# Altium PCB RC522.PcbDoc
Units mm, origin at the board's own origin, x right, y up, seen from the top; angles counter-clockwise.
Board outline 99 x 70 mm, 2 copper layers (Top Layer, Bottom Layer); 14 components, 17 nets, 89 pads, 0 vias.
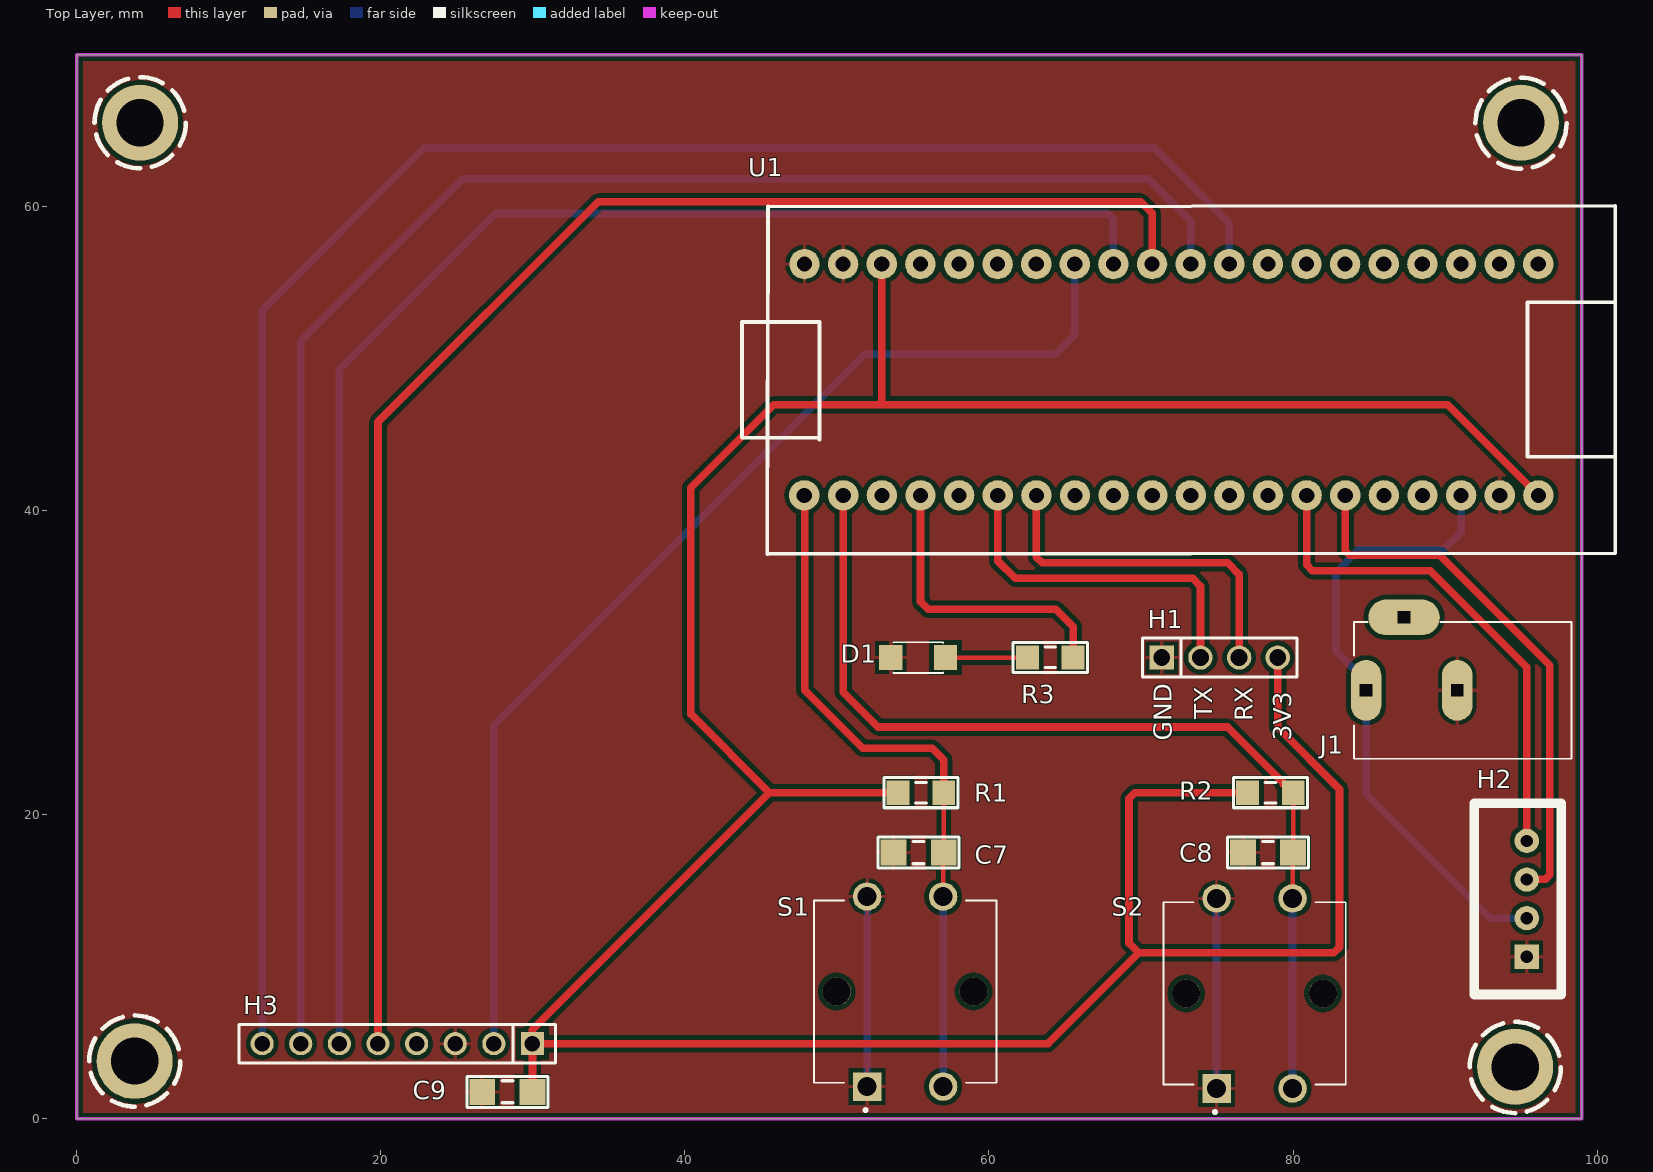
[diagram p0: Top Layer view]
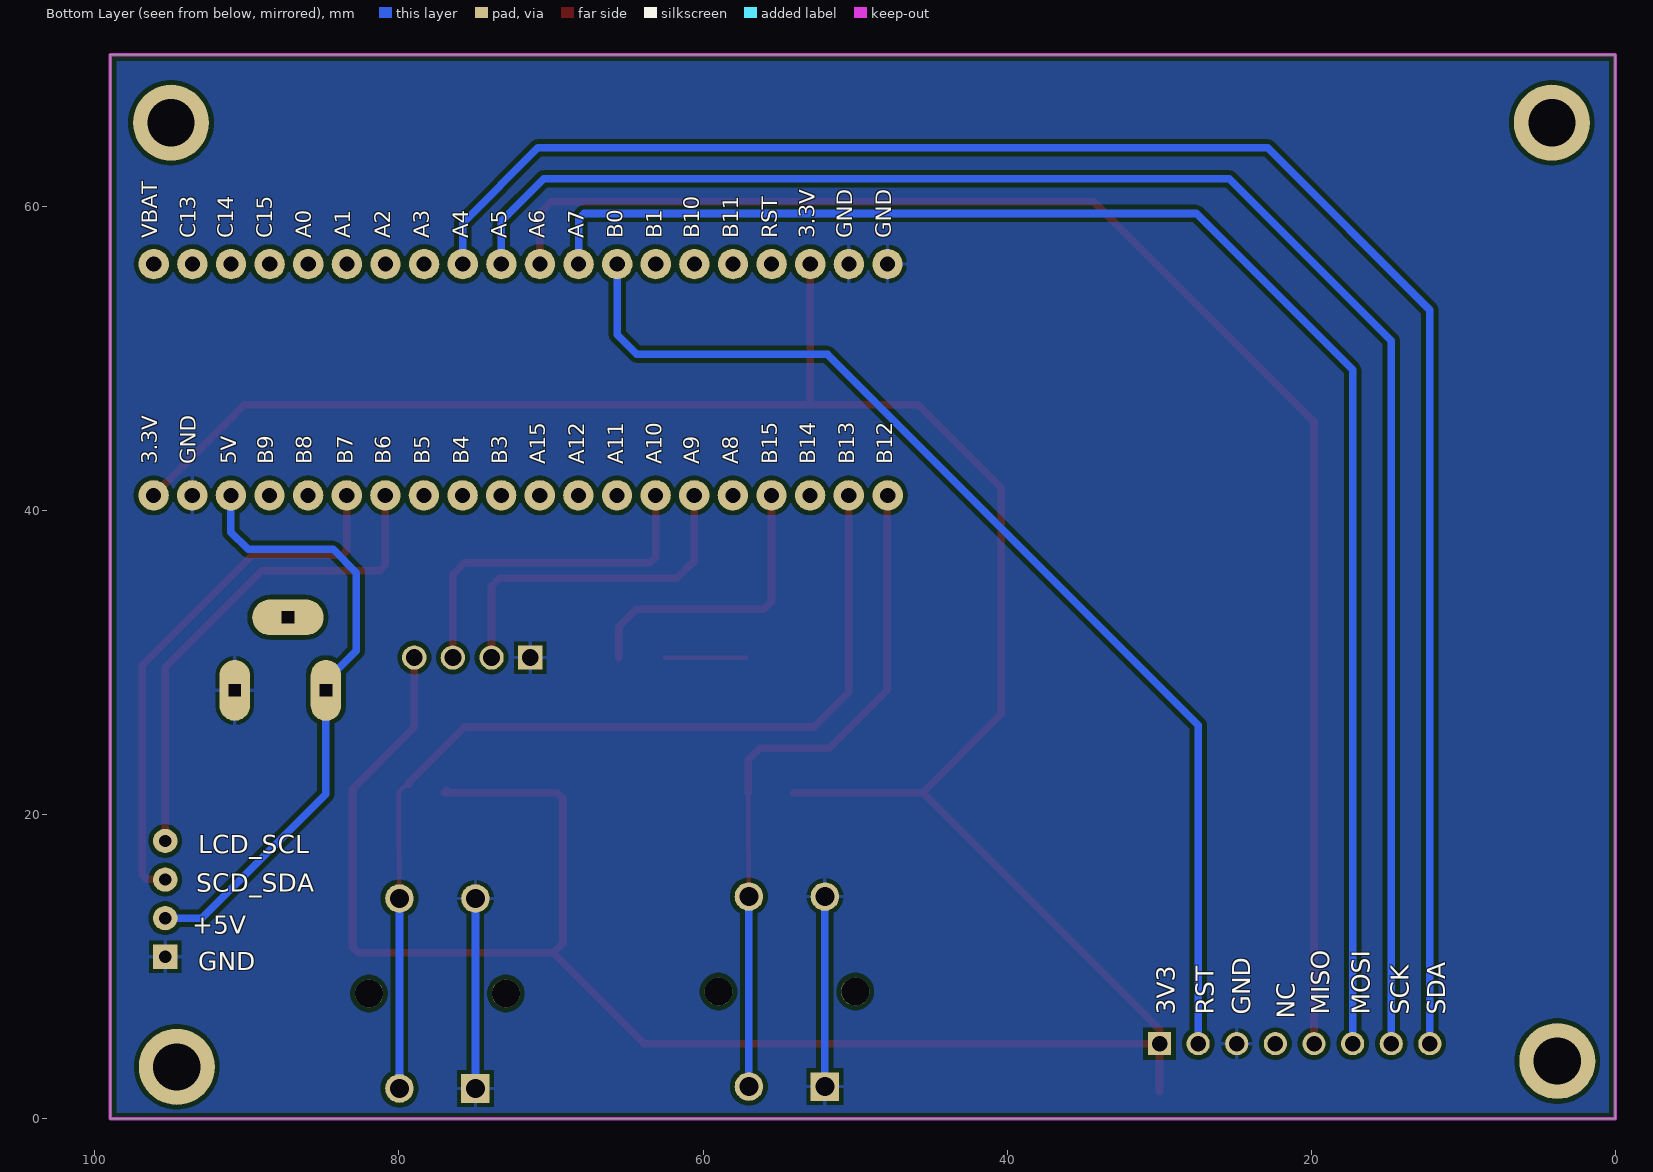
[diagram p1: Bottom Layer view, seen from below]
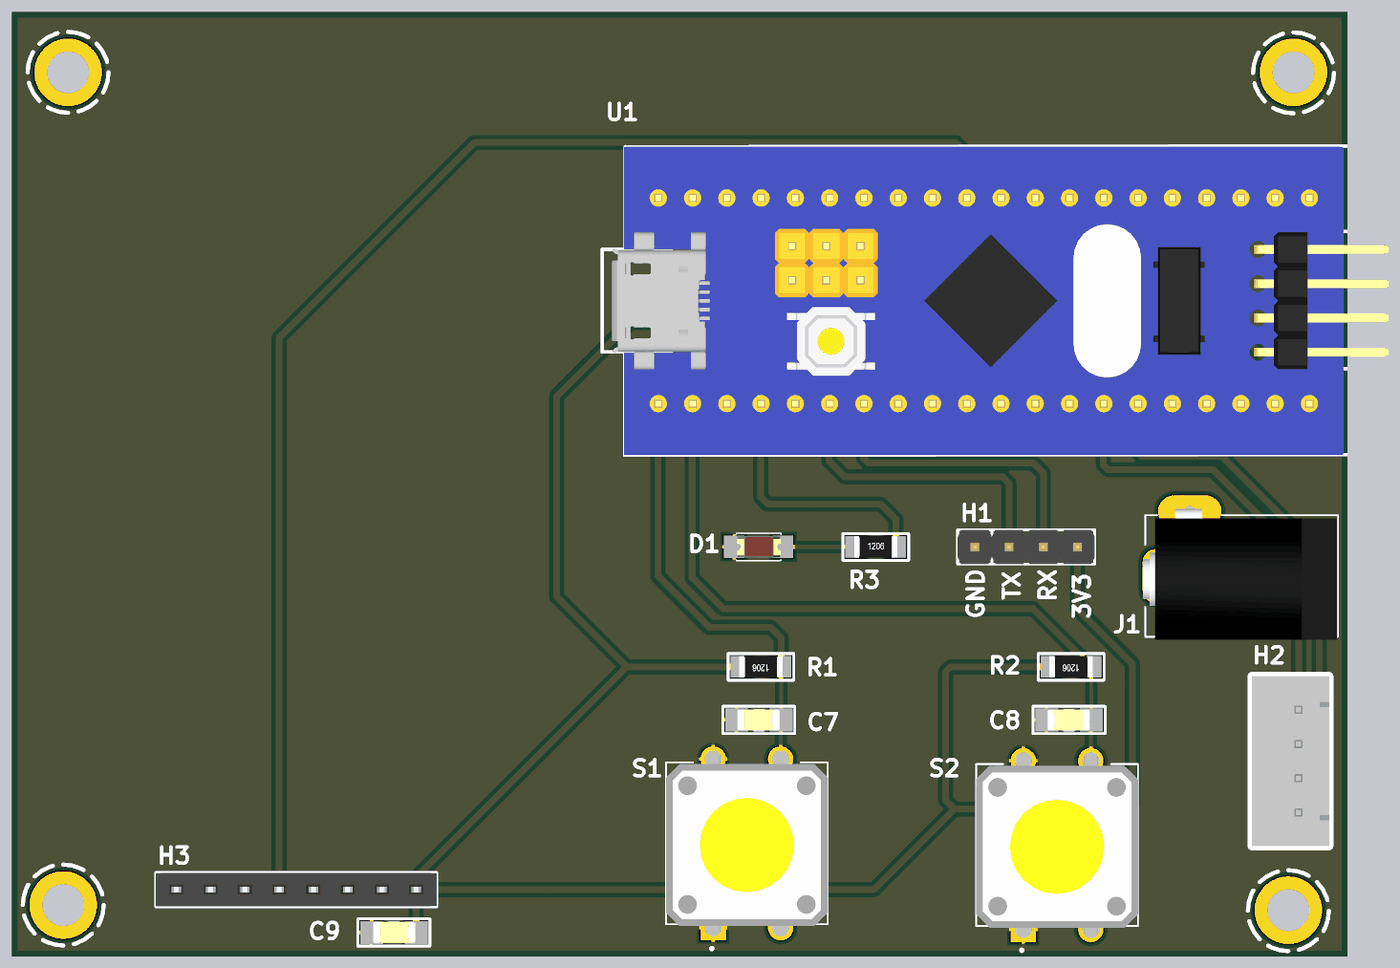
[diagram p2: 3D render of the assembled board from above, using the file's embedded part models]

## Layer stack, top to bottom
Top Solder: solder mask 0.0102, Solder Resist, Dk 3.5
Top Layer: signal copper 0.0356
Dielectric 1: dielectric 0.32, FR-4, Dk 4.8
Bottom Layer: signal copper 0.0356
Bottom Solder: solder mask 0.0102, Solder Resist, Dk 3.5

## Board outline
0,0 0,70 99,70 99,0

## Design rules (kind name [scope] priority, off if disabled: settings)
Clearance [All] p1: gap=0.3 ignorepadtopadclearanceinfootprint=FALSE
PolygonConnect [All] p1: connectstyle=Relief reliefconductorwidth=0.254 reliefentries=4 polygonreliefangle="90 Angle" airgapwidth=0.254
RoutingCorners [All] p1: cornerstyle=45-Degree minsetback=4 maxsetback=4
RoutingVias [All] p1: holewidth=0.711 width=1.27 viastyle="Through Hole" minholewidth=0.711 minwidth=1.27 maxholewidth=0.711 maxwidth=1.27
SolderMaskExpansion [All] p1: expansion=0.102 istentingtop=FALSE
Width [All] p1: maxlimit=0.5 minlimit=0.3 preferedwidth=0.3
29 further rules are at their usual default settings.

## Components (designator, comment, footprint, x,y, rotation, side; value= is the part's Value field where it differs from the comment)
C7 "104" "tu 1206" 55.372,17.526 r180 top
C8 "104" "tu 1206" 78.359,17.526 r180 top
C9 "104" "tu 1206" 28.321,1.778 r0 top
D1 "LED" LED-1206-Red 57.15,30.353 r180 top (schematic designator L1)
H1 "JP 1x4 2.54" "JP 1x4 DT" 71.374,30.353 r0 top
H2 "LCD" XH2.54M-4 95.377,10.668 r90 top
H3 "RC552" "JP 1x8 CT" 29.972,4.953 r180 top
J1 "DC-005" NINIGI_DC-005 87.305,28.194 r180 top
R1 "10k" "tro smd 1206" 55.523,21.463 r180 top
R2 "10k" "tro smd 1206" 78.51,21.463 r180 top
R3 "470R" "tro smd 1206" 64.032,30.353 r0 top
S1 "DK_Thẻ" SW_B3F-4055 54.483,8.382 r90 top
S2 "Điểm Danh" SW_B3F-4055 77.47,8.255 r90 top
U1 "STM32F103C8T6" "Stm32 BluePill" 77.762,48.849 r270 top

## Footprints (in the part's own frame and the unit in brackets; to place one, negate y for a bottom-side part, rotate by r counter-clockwise, add the part's x,y. Pads: shape width x height; smd on the part's side, far side on the other; paste and mask are expansions set on the pad)
"JP 1x4 DT" [mm] "4 pins, 1 row, straight, gold plating"
  rect 1.6x1.6 hole 1.1: 1(0,0)
  round 1.6 hole 1.1: 2(2.54,0) 3(5.08,0) 4(7.62,0)
  silkscreen extent -1.27,-1.27 8.89,1.27, body extent -1.27,-1.27 8.89,1.27, height 8.54
"JP 1x8 CT" [mm] "8 row, straight, gold plating"
  rect 1.52x1.52 hole 1.02: 1(0,0)
  round 1.52 hole 1.02: 2(2.54,0) 3(5.08,0) 4(7.62,0) 5(10.16,0) 6(12.7,0) 7(15.24,0) 8(17.78,0)
  silkscreen extent -1.52,-1.27 19.3,1.27, body extent -1.52,-1.25 19.3,1.25, height 8.51
LED-1206-Red [mil]
  rect 60x65 smd: 1(0,0) 2(142,0)
  silkscreen extent 6,-40 136,40, body extent 7,-31 133,32, height 43
NINIGI_DC-005 [mm]
  oval 4.7x2.35 hole 0.8 square: 2(0,-4.8)
  oval 2x4 hole 0.8 square: 3(-3.5,0) 4(2.5,0)
  silkscreen extent -11,-4.5 3.3,4.5, body extent -10.92,-4.98 3.48,4.72, height 11
"Stm32 BluePill" [mm]
  round 2 hole 1: 1(7.828,-29.909) 2(7.828,-27.343) 3(7.828,-24.803) 4(7.828,-22.263) 5(7.828,-19.723) 6(7.828,-17.183) 7(7.828,-14.643) 8(7.828,-12.103) 9(7.828,-9.563) 10(7.828,-7.023) 11(7.828,-4.483) 12(7.828,-1.943) 13(7.828,0.597) 14(7.828,3.137) 15(7.828,5.677) 16(7.828,8.217) 17(7.828,10.757) 18(7.828,13.297) 19(7.828,15.837) 20(7.828,18.377) 21(-7.386,18.366) 22(-7.386,15.826) 23(-7.386,13.286) 24(-7.386,10.746) 25(-7.386,8.206) 26(-7.386,5.666) 27(-7.386,3.126) 28(-7.386,0.586) 29(-7.386,-1.954) 30(-7.386,-4.494) 31(-7.386,-7.034) 32(-7.386,-9.574) 33(-7.386,-12.114) 34(-7.386,-14.654) 35(-7.386,-17.194) 36(-7.386,-19.734) 37(-7.386,-22.274) 38(-7.386,-24.814) 39(-7.386,-27.354) 40(-7.386,-29.894)
  silkscreen extent -11.22,-34 11.69,23.43, body extent -11.18,-33.27 11.68,24.29, height 12.31
SW_B3F-4055 [mm]
  rect 1.875x1.875 hole 1.25: 1(-6.25,2.5)
  round 1.875 hole 1.25: 2(6.25,2.5) 3(-6.25,-2.5) 4(6.25,-2.5)
  round 1.85 hole 1.85 unplated: ""(0,4.5) ""(0,-4.5)
  silkscreen extent -7.9,-6 6,6, body extent -7.13,-6 6.87,6, height 6.9
"tro smd 1206" [mm]
  rect 1.5x1.6 smd: 1(-1.5,0) 2(1.5,0)
  silkscreen extent -2.44,-0.99 2.44,0.99, body extent -1.6,-0.8 1.6,0.8, height 0.6
"tu 1206" [mm]
  rect 1.7x1.7 smd: 1(-1.65,0) 2(1.65,0)
  silkscreen extent -2.67,-1.02 2.67,1.02, body extent -1.57,-0.8 1.63,0.8, height 0.94
XH2.54M-4 [mm]
  rect 1.6x1.6 hole 0.8: 1(0,0)
  round 1.6 hole 0.8: 2(2.54,0) 3(5.08,0) 4(7.62,0)
  silkscreen extent -2.48,-2.26 10.1,3.46, body extent -2.48,-2.26 10.1,3.48, height 6.91

## Part data
C7 C8 C9: library part "Tu 1206 104 50V 20%", "Dán", Chung_Loai=Dán, Don_Vi=Con, Ma_Hang=MH004544, So_Chan=2, Ten_Linh_Kien="Tụ 1206 104-0.1uF 20% 50V"
D1: library part "LED 1206 Do", "Dán", Chung_Loai=Dán, Don_Vi=Con, Ma_Hang=MH002334, Ten_Linh_Kien="LED1206 Màu Đỏ (Red)"
H1: library part "JP 1x4 2.54 Duc Thang", "Cắm", Chung_Loai=Cắm, Don_Vi=Con, Ma_Hang=MH000903, Ten_Linh_Kien="Jump Đơn Đực 2.54MM 1x40P Thẳng 11MM"
H2: library part "Header 4P 2.54 Duc Thang", "Cắm", Chung_Loai=Cắm, Don_Vi=Con, Ma_Hang=MH001285, Ten_Linh_Kien="Header 4P XH2.54-4P Đực Thẳng"
H3: library part "JP 1x8 2.54 Cai Thang", "Cắm", Chung_Loai=Cắm, Don_Vi=Con, Ma_Hang=MH004006, Ten_Linh_Kien="Jump Đơn Cái 2.54MM 1x20P Thẳng"
J1: "DC Jack", Package=None, Availability=Unavailable, MP=DC-005, Price=None
R1 R2: library part "Tro 1206 1% 10k", "Dán", Chung_Loai=Dán, Don_Vi=Con, Ma_Hang=MH005885, So_Chan=2, Ten_Linh_Kien="Trở 1206 1% 10k"
R3: library part "Tro 1206 1% 1k", "Dán", Chung_Loai=Dán, Don_Vi=Con, Ma_Hang=MH005880, So_Chan=2, Ten_Linh_Kien="Trở 1206 1% 1k"
S1 S2: library part B3F-4055, Package=None, Availability=Unavailable, MP=B3F-4055, Price=None
U1: library part BluePill, "Designed By @Alixahedi"

## Free pads (board coordinates)
  round 5 hole 3.1: ""(3.81,3.81) ""(4.166,65.532) ""(94.615,3.429) ""(94.996,65.532)

## Nets (pads, with @x,y where several pads share a name; then routed paths per layer and width w, separated by ;. In a path a pad name is that pad's centre, name@x,y a point inside that pad or via, vN(x,y) a via of type N, cw(c..) or ccw(c..) an arc to the next point about the centre after c; other vN are vias at no path point)
3V3: C9.2 H1.4 H3.1 R1.2 R2.2 U1.20 U1.38 | length 221.6
  Top Layer w0.5: C9.2 C9.2 H3.1 ; U1.38 52.948,47.001 52.959,46.99 ; R1.2 45.563,21.463 ; R2.2@76.848,21.625 R2.2 69.596,21.463 69.215,21.082 69.215,11.557 69.85,10.922 ; H1.4 78.994,25.759 83.058,21.695 83.058,11.303 82.677,10.922 69.85,10.922 ; U1.20 90.17,46.99 52.959,46.99 ; H3.1 63.881,4.953 69.85,10.922 ; H3.1 29.957,4.968 29.957,5.857 45.563,21.463 ; 45.563,21.463 40.386,26.64 40.386,41.529 45.847,46.99 52.959,46.99
+5: H2.2 J1.4 U1.18 | length 41.1
  Bottom Layer w0.5: U1.18 91.059,38.608 89.916,37.465 84.328,37.465 82.804,35.941 82.804,30.789 84.805,28.788 84.805,23.368 84.805,21.367 92.964,13.208 H2.2
BT1: C7.1 R1.1 S1.3 S1.4 U1.1 | length 45.4
  Top Layer w0.3: U1.1 U1.1@47.879,40.996 ; S1.4 56.983,17.487 C7.1 C7.1 R1.1@57.023,21.513
  Top Layer w0.5: U1.1@47.879,40.996 47.879,28.194 51.689,24.384 56.261,24.384 57.023,23.622 R1.1
  Bottom Layer w0.5: S1.3 S1.4
BT2: C8.1 R2.1 S2.3 S2.4 U1.2 | length 64.9
  Top Layer w0.3: R2.1@79.36,22.113 79.41,22.113 80.01,21.513 C8.1 79.97,17.487 S2.4
  Top Layer w0.5: U1.2 50.419,28.067 52.705,25.781 75.692,25.781 79.36,22.113 79.36,22.017 R2.1@79.364,22.013
  Bottom Layer w0.5: S2.3 S2.4
GND: C7.2 C8.2 C9.1 D1.2 H1.1 H2.1 H3.3 J1.3 S1.1 S1.2 S2.1 S2.2 U1.19 U1.39 U1.40 | length 25
  Bottom Layer w0.5: S1.1 S1.2 ; S2.1 S2.2
LCD_SCL: H2.4 U1.14 | length 33.3
  Top Layer w0.5: U1.14 80.899,36.449 81.28,36.068 89.027,36.068 95.377,29.718 H2.4
LCD_SDA: H2.3 U1.15 | length 35.7
  Top Layer w0.5: U1.15 83.439,37.377 83.732,37.084 89.662,37.084 96.901,29.845 96.901,16.065 96.608,15.773 95.402,15.773 H2.3
LED: R3.2 U1.4 | length 19.7
  Top Layer w0.5: U1.4 55.499,34.036 56.007,33.528 64.389,33.528 65.532,32.385 R3.2
MISO: H3.5 U1.31 | length 101.5
  Top Layer w0.5: H3.5 19.812,45.847 34.29,60.325 69.977,60.325 70.739,59.563 70.739,56.246 U1.31
MOSI: H3.6 U1.32 | length 102.6
  Bottom Layer w0.5: H3.6 17.272,49.276 27.559,59.563 67.818,59.563 68.188,59.193 U1.32
NC: H3.4
NetL1_1: D1.1 R3.1 | length 5.4
  Top Layer w0.3: D1.1 R3.1
RST: H3.2 U1.33 | length 74.5
  Bottom Layer w0.5: H3.2 27.432,25.908 51.816,50.292 64.35,50.292 65.648,51.59 U1.33
RX: H1.3 U1.7 | length 23.3
  Top Layer w0.5: U1.7 63.119,36.957 63.5,36.576 75.692,36.576 76.454,35.814 H1.3
SCK: H3.7 U1.30 | length 113.2
  Bottom Layer w0.5: H3.7 14.732,51.181 25.4,61.849 70.485,61.849 73.268,59.066 U1.30
SDA: H3.8 U1.29 | length 121.1
  Bottom Layer w0.5: H3.8 12.192,53.213 22.86,63.881 70.866,63.881 75.819,58.928 75.819,56.246 U1.29
TX: H1.2 U1.6 | length 23
  Top Layer w0.5: U1.6 60.579,36.703 61.722,35.56 73.406,35.56 73.914,35.052 H1.2
pads on no net: J1.2 S1. S2. U1.3 U1.5 U1.8 U1.9 U1.10 U1.11 U1.12 U1.13 U1.16 U1.17 U1.21 U1.22 U1.23 U1.24 U1.25 U1.26 U1.27 U1.28 U1.34 U1.35 U1.36 U1.37

## Polygon pours and split planes (outlines as drawn)
GND on Bottom Layer "GND_L02_P000" (solid, pour order 0): 0,69.977 98.933,69.977 98.933,0.127 0,0.127
GND on Top Layer "GND_L01_P001" (solid, pour order 1): 0,69.977 98.933,69.977 98.933,0.127 0,0.127

## Keep-outs
Keep-Out Layer:
  the board outline again, w0.23

## Silkscreen, mask and mechanical layers (free items; w line width, h text height)
Top Overlay:
  lines w0.3: 0.81,3.81 cw(c3.81,3.81) 1.212,5.31 ; 0.912,3.034 ccw(c3.81,3.81) 1.689,1.689 ; 1.166,65.532 cw(c4.166,65.532) 1.568,67.032 ; 1.268,64.756 ccw(c4.166,65.532) 2.045,63.411 ; 1.689,5.931 cw(c3.81,3.81) 3.034,6.708 ; 2.045,67.653 cw(c4.166,65.532) 3.39,68.43 ; 2.31,1.212 ccw(c3.81,3.81) 3.81,0.81 ; 2.666,62.934 ccw(c4.166,65.532) 4.166,62.532 ; 4.586,0.912 ccw(c3.81,3.81) 5.931,1.689 ; 4.942,62.634 ccw(c4.166,65.532) 6.287,63.411 ; 5.931,5.931 cw(c3.81,3.81) 6.708,4.586 ; 6.287,67.653 cw(c4.166,65.532) 7.064,66.308 ; 6.408,2.31 ccw(c3.81,3.81) 6.81,3.81 ; 6.764,64.032 ccw(c4.166,65.532) 7.166,65.532 ; 91.615,3.389 cw(c94.615,3.389) 92.017,4.889 ; 91.717,2.613 ccw(c94.615,3.389) 92.494,1.268 ; 91.996,65.492 cw(c94.996,65.492) 92.398,66.992 ; 92.098,64.716 ccw(c94.996,65.492) 92.875,63.371 ; 92.494,5.51 cw(c94.615,3.389) 93.839,6.287 ; 92.875,67.613 cw(c94.996,65.492) 94.22,68.39 ; 93.115,0.791 ccw(c94.615,3.389) 94.615,0.389 ; 93.496,62.894 ccw(c94.996,65.492) 94.996,62.492 ; 95.391,0.491 ccw(c94.615,3.389) 96.736,1.268 ; 95.772,62.594 ccw(c94.996,65.492) 97.117,63.371 ; 96.736,5.51 cw(c94.615,3.389) 97.513,4.165 ; 97.117,67.613 cw(c94.996,65.492) 97.894,66.268 ; 97.213,1.889 ccw(c94.615,3.389) 97.615,3.389 ; 97.594,63.992 ccw(c94.996,65.492) 97.996,65.492 ; 3.81,6.81 cw(c3.81,3.81) 5.31,6.408 ccw(c3.81,3.81) 3.81,6.81 ; 4.166,68.532 cw(c4.166,65.532) 5.666,68.13 ccw(c4.166,65.532) 4.166,68.532 ; 94.615,6.389 cw(c94.615,3.389) 96.115,5.987 ccw(c94.615,3.389) 94.615,6.389 ; 94.996,68.492 cw(c94.996,65.492) 96.496,68.09 ccw(c94.996,65.492) 94.996,68.492
  text "TX" at 74.676,26.289 h1.2 r90
  text "RX" at 77.343,26.162 h1.2 r90
  text "GND" at 72.009,24.892 h1.2 r90
  text "3V3" at 79.883,24.892 h1.2 r90
Bottom Overlay:
  text "LCD_SCL" at 93.218,17.472 h1.2
  text "SCD_SDA" at 93.345,14.932 h1.2
  text "+5V" at 93.599,12.192 h1.2
  text "GND" at 93.218,9.779 h1.2
  text "SDA" at 11.176,6.858 h1.2 r270
  text "SCK" at 13.589,6.858 h1.2 r270
  text "MOSI" at 16.129,6.858 h1.2 r270
  text "MISO" at 18.796,6.858 h1.2 r270
  text "GND" at 24.003,6.858 h1.2 r270
  text "RST" at 26.416,6.858 h1.2 r270
  text "3V3" at 28.956,6.858 h1.2 r270
  text "NC" at 21.082,6.604 h1.2 r270

## Text inside footprints (layer, text, board x,y; h text height)
U1: Bottom Overlay "B12" at 47.18,43.078 h1.78 r270; Bottom Overlay "GND" at 47.25,57.937 h1.78 r270; Bottom Overlay "B13" at 49.689,43.078 h1.78 r270; Bottom Overlay "GND" at 49.815,57.937 h1.78 r270; Bottom Overlay "A1" at 82.842,57.937 h1.78 r270; Bottom Overlay "A0" at 85.401,57.937 h1.78 r270; Bottom Overlay "C14" at 90.531,57.937 h1.78 r270; Bottom Overlay "C13" at 93.022,57.937 h1.78 r270; Bottom Overlay "C15" at 87.966,57.937 h1.78 r270; Bottom Overlay "B6" at 80.194,43.078 h1.78 r270; Bottom Overlay "B4" at 75.044,43.078 h1.78 r270; Bottom Overlay "B7" at 82.664,43.078 h1.78 r270; Bottom Overlay "B14" at 52.26,43.078 h1.78 r270; Bottom Overlay "B5" at 77.628,43.078 h1.78 r270; Bottom Overlay "VBAT" at 95.542,57.938 h1.78 r270; Bottom Overlay "A10" at 62.363,43.078 h1.78 r270; Bottom Overlay "A12" at 67.45,43.078 h1.78 r270; Bottom Overlay "A15" at 70.034,43.078 h1.78 r270; Bottom Overlay "A9" at 59.874,43.078 h1.78 r270; Bottom Overlay "B3" at 72.524,43.078 h1.78 r270; Bottom Overlay "A11" at 64.884,43.078 h1.78 r270; Bottom Overlay "A8" at 57.308,43.078 h1.78 r270; Bottom Overlay "B15" at 54.743,43.078 h1.78 r270; Bottom Overlay "3.3V" at 52.306,57.937 h1.78 r270; Bottom Overlay "B1" at 62.37,57.937 h1.78 r270; Bottom Overlay "B0" at 64.928,57.937 h1.78 r270; Bottom Overlay "A7" at 67.475,57.937 h1.78 r270; Bottom Overlay "A6" at 70.059,57.937 h1.78 r270; Bottom Overlay "B11" at 57.315,57.937 h1.78 r270; Bottom Overlay "B10" at 59.899,57.937 h1.78 r270; Bottom Overlay "RST" at 54.768,57.937 h1.78 r270; Bottom Overlay "A4" at 75.07,57.937 h1.78 r270; Bottom Overlay "A3" at 77.655,57.937 h1.78 r270; Bottom Overlay "A2" at 80.2,57.937 h1.78 r270; Bottom Overlay "A5" at 72.548,57.937 h1.78 r270; Bottom Overlay "GND" at 93.021,43.078 h1.78 r270; Bottom Overlay "3.3V" at 95.536,43.078 h1.78 r270; Bottom Overlay "B8" at 85.375,43.078 h1.78 r270; Bottom Overlay "B9" at 87.915,43.078 h1.78 r270; Bottom Overlay "5V" at 90.328,43.078 h1.78 r270